# Altium PCB ProjectAir_Pcb.PcbDoc
Units mil, origin at the board's own origin, x right, y up, seen from the top; angles counter-clockwise.
Board outline 2165.35 x 1771.65 mil, 4 copper layers (Top Layer, GND02, PWR03, Bottom Layer), stack 23.756 mil thick; 49 components, 30 nets, 170 pads, 99 vias.
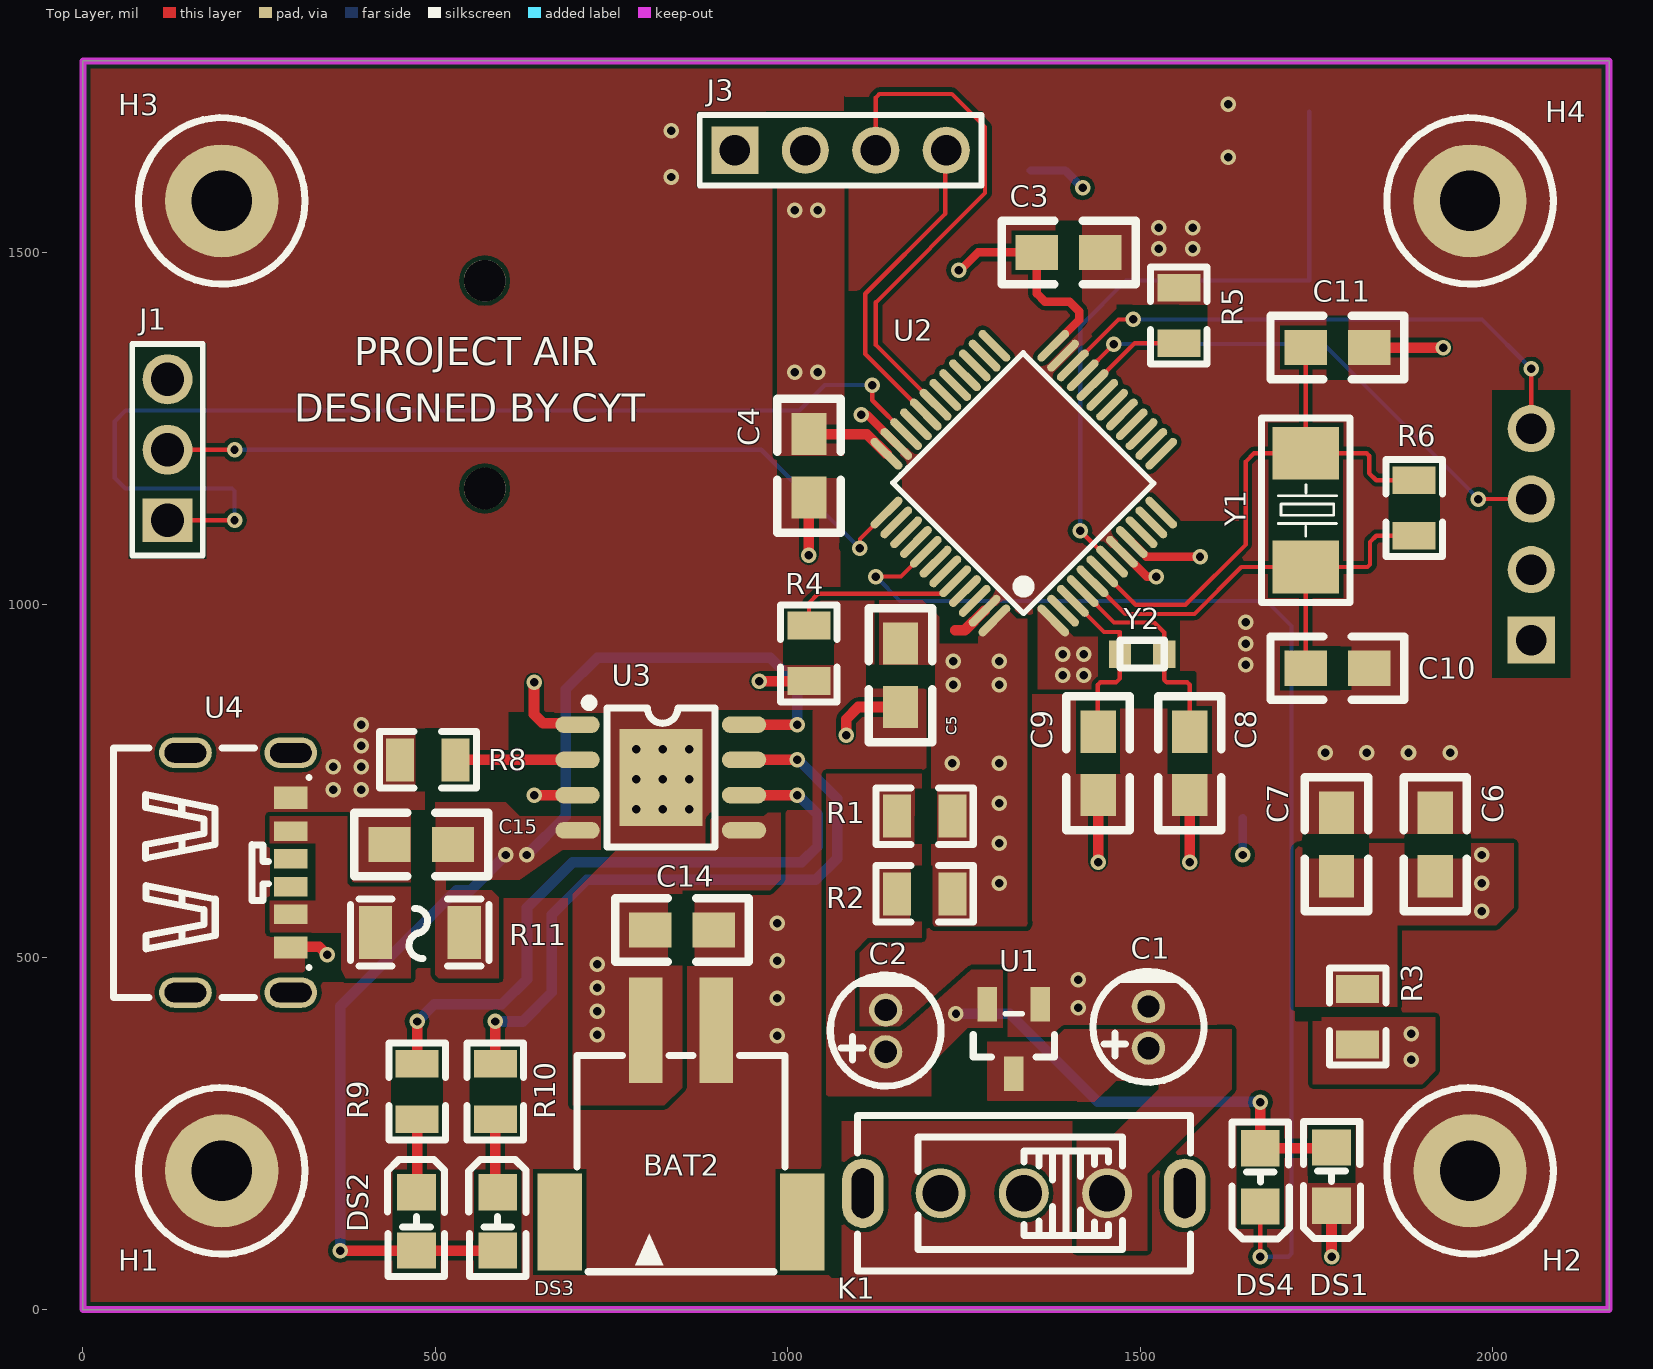
[diagram p0: Top Layer view]
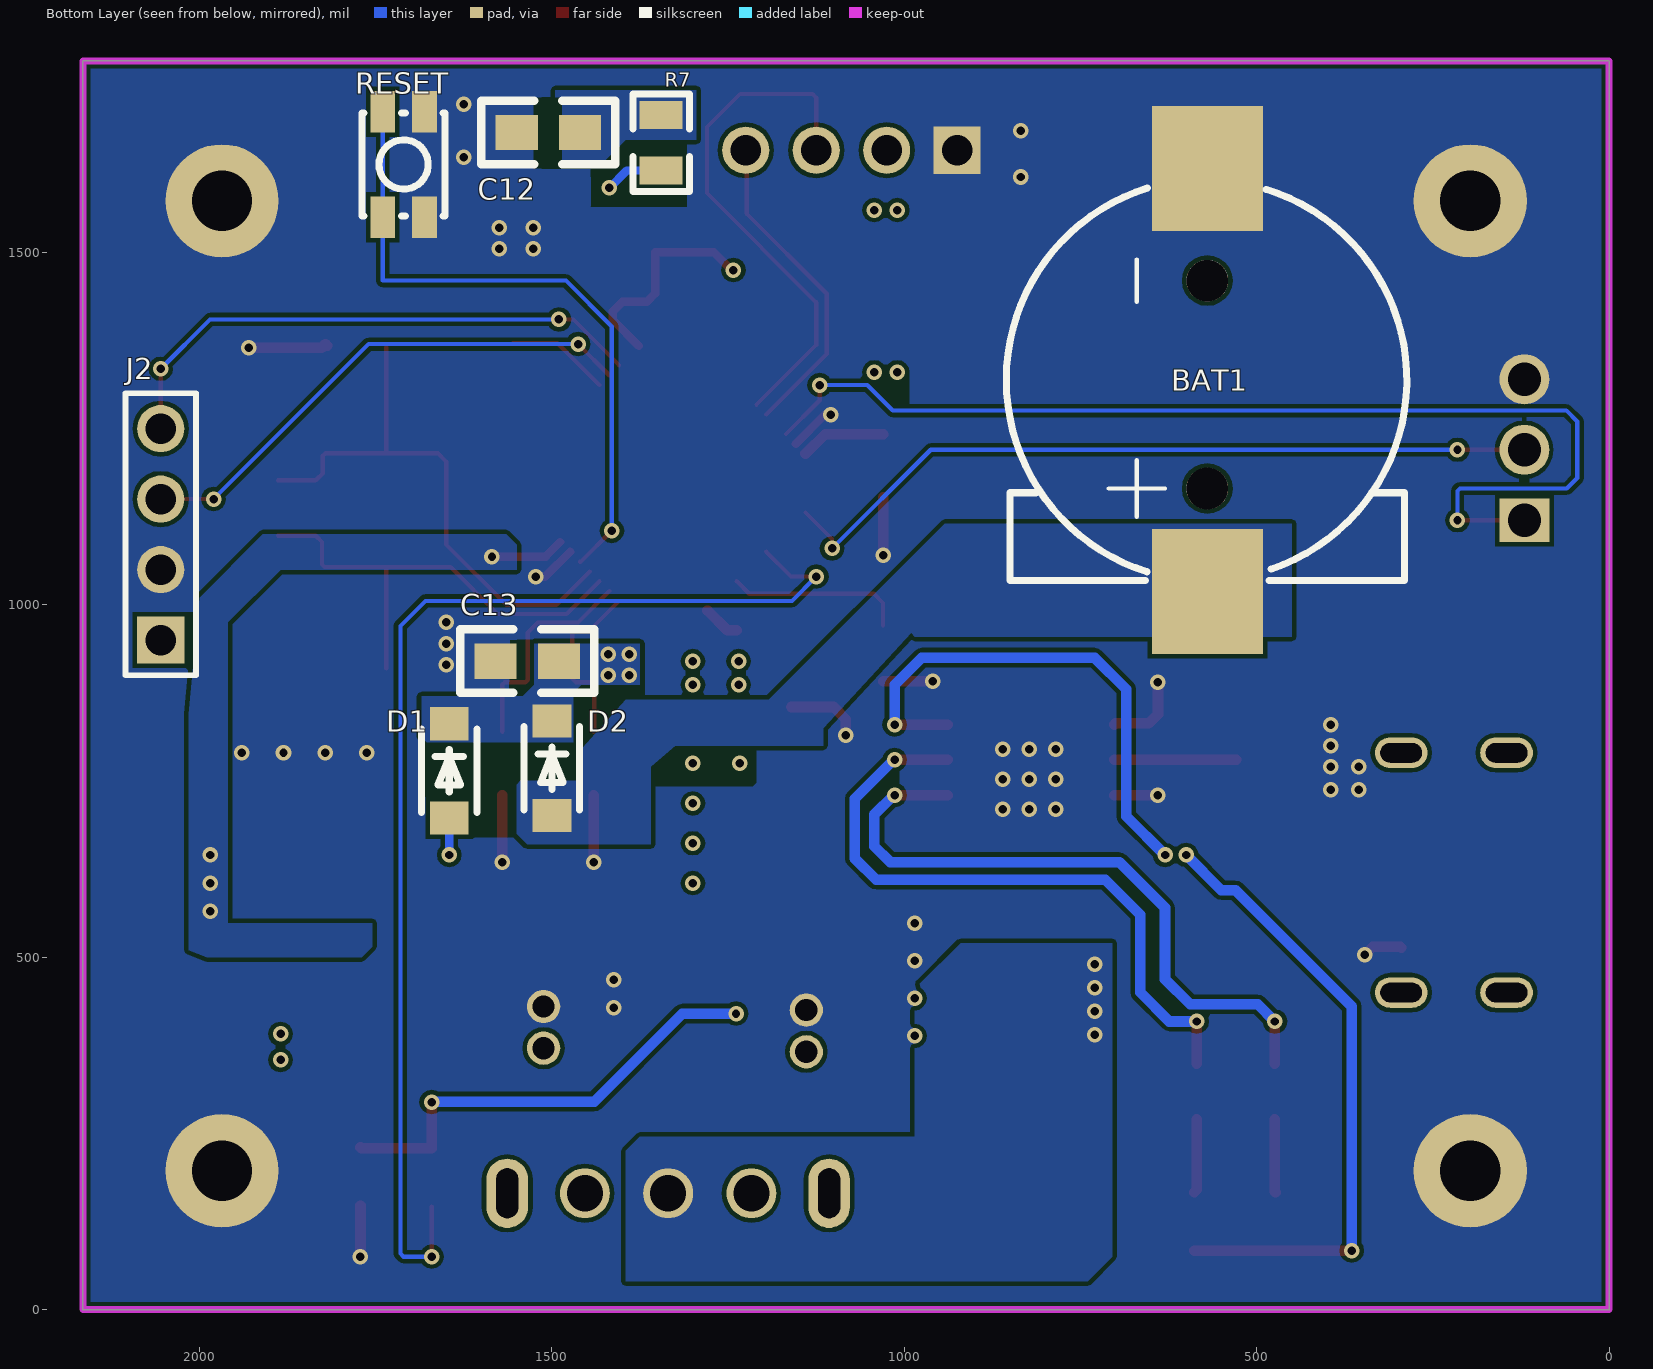
[diagram p1: Bottom Layer view, seen from below]
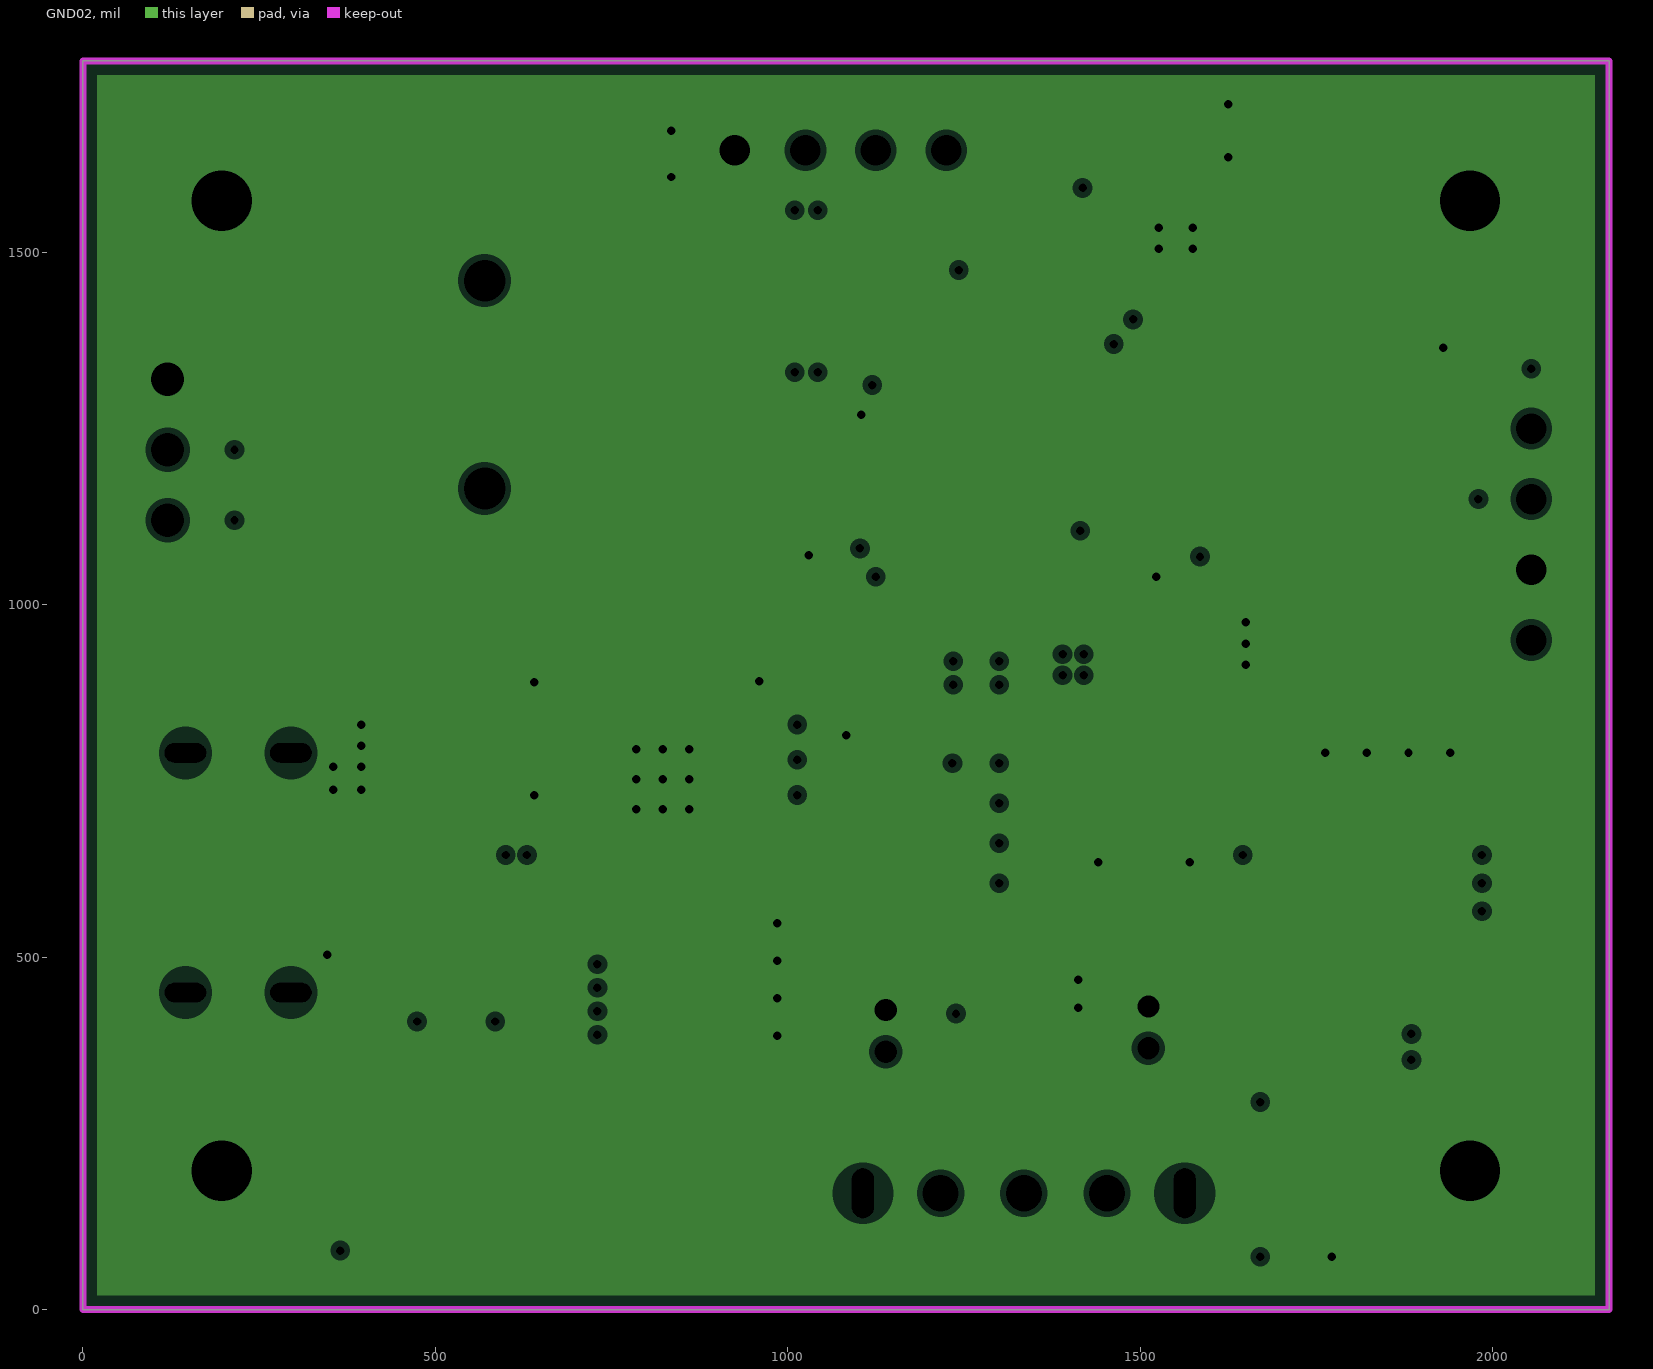
[diagram p2: GND02, clearances drawn from the general rule]
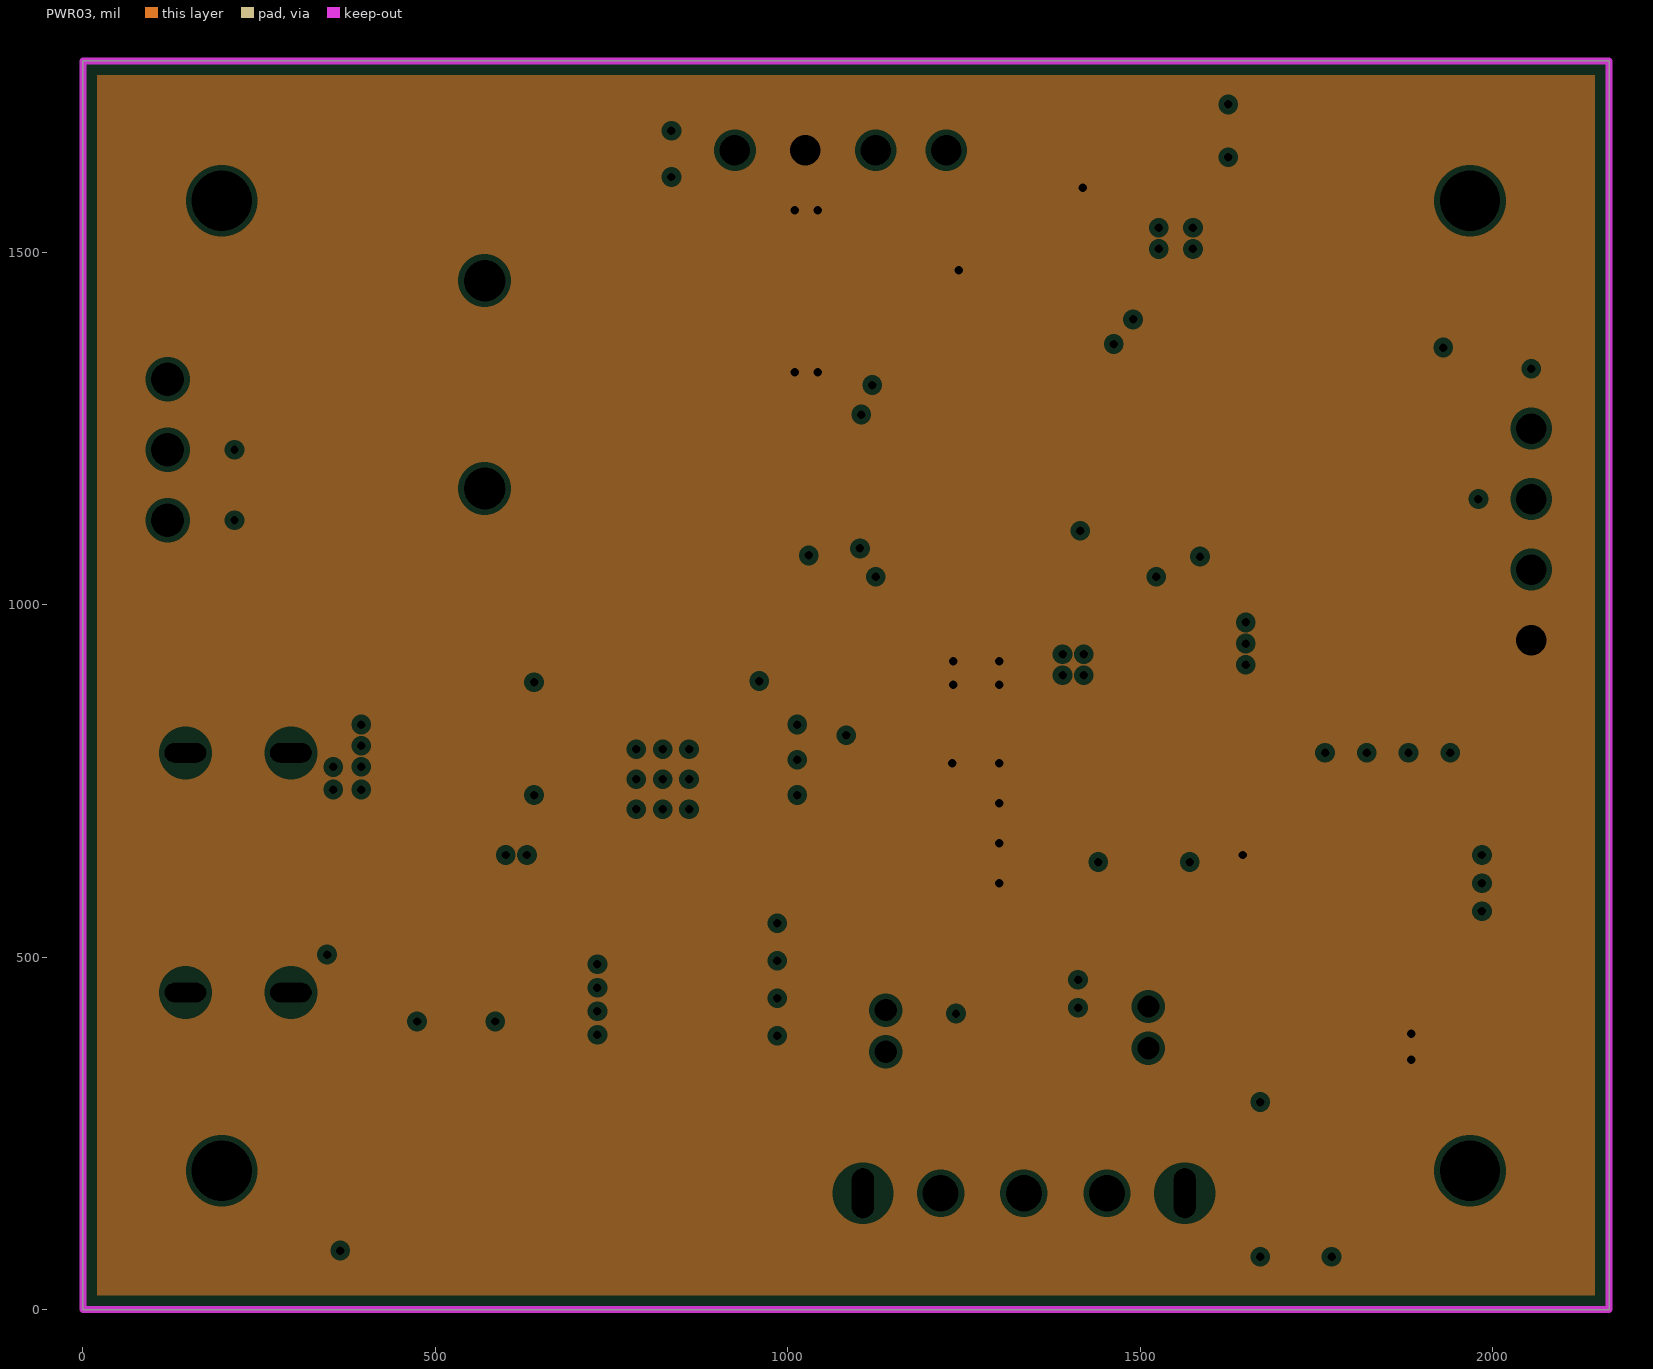
[diagram p3: PWR03, clearances drawn from the general rule]

## Layer stack, top to bottom
Top Solder: solder mask 0.4, Solder Resist, Dk 3.5
Top Layer: signal copper 1.4
Dielectric 2: prepreg 2.8, PP-006, Dk 4.1
GND02: plane copper 1.3779, net GND
Dielectric 1: dielectric 12.6, FR-4, Dk 4.8
PWR03: plane copper 1.3779, net VCC3.3M
Dielectric 3: prepreg 2.8, PP-006, Dk 4.1
Bottom Layer: signal copper 1.4
Bottom Solder: solder mask 0.4, Solder Resist, Dk 3.5

## Board outline
0,0 2165.35,0 2165.35,1771.65 0,1771.65

## Design rules (kind name [scope] priority, off if disabled: settings)
Clearance [All] p1: gap=6 ignorepadtopadclearanceinfootprint=FALSE
PlaneClearance [All] p1: clearance=8
PlaneConnect [All] p1: planeconnectstyle=Direct reliefexpansion=20 reliefentries=4 reliefconductorwidth=10 reliefairgap=10
PolygonConnect [All] p1: connectstyle=Direct reliefconductorwidth=10 reliefentries=4 polygonreliefangle="90 Angle" airgapwidth=10
RoutingVias [All] p1: holewidth=12 width=22 viastyle="Through Hole" minholewidth=12 minwidth=22 maxholewidth=14 maxwidth=26
SilkToSilkClearance [All] p1: silktosilkclearance=2
SolderMaskExpansion [All] p1: expansion=4
Width PWR [InNetClass('PWR')] p1: maxlimit=60 minlimit=12 preferedwidth=15 minimp=50.000000 maximp=50.000000 favimp=50.000000
Width [All] p2: maxlimit=10 minlimit=6 preferedwidth=6
27 further rules are at their usual default settings.

## Classes and differential pairs
net class PWR: GND NetDS2_2 NetDS3_2 NetR8_1 NetR9_2 NetR10_2 VBAT VCC3.3M VCC3.3V VCC3.7V VCC5V VDDA VUSB

## Components (designator, comment, footprint, x,y, rotation, side; value= is the part's Value field where it differs from the comment)
BAT1 "BATT" BAT_RTC 581.77,1315.41 r90 bottom
BAT2 "MAINBATTARY" MAINBAT 850,218.62 r0 top
C1 "Cap Pol3" "C Pol" 1510.52,401.32 r90 top value=1uF
C2 "Cap Pol3" "C Pol" 1137.83,396.16 r90 top value=1uF
C3 "104" 0805 1443.51,1499.94 r180 top
C4 "104" 0805 1029.94,1152.22 r90 top
C5 "104" 0805 1159.94,855 r90 top
C6 "10uF" 0805 1918.84,705 r270 top
C7 "104" 0805 1778.78,705 r270 top
C8 "10" 0805 1570.39,730 r90 top
C9 "10" 0805 1440.39,730 r90 top
C10 "22" 0805 1825,909.94 r180 top
C11 "22" 0805 1825,1364.94 r180 top
C12 "104" 0805 1460,1669.94 r0 bottom
C13 "104" 0805 1580,920.06 r180 bottom
C14 "10uF" 0805 895,538.62 r180 top
C15 "10uF" 0805 435,660.06 r0 top
D1 "1N4148" SOD-123 1645,765 r270 bottom
D2 "1N4148" SOD-123 1499.37,768.62 r270 bottom
DS1 "LED BLUE" 0805D 1772.66,186.1 r90 top
DS2 "LED GREEN" 0805D 472.06,127.64 r270 top
DS3 "LED RED" 0805D 587.39,127.64 r270 top
DS4 "LED BLUE" 0805D 1671.61,185 r90 top
H1 "HOLE" M2孔 196.85,196.85 r0 top
H2 "HOLE" M2孔 1968.15,196.85 r0 top
H3 "HOLE" M2孔 196.85,1573.15 r0 top
H4 "HOLE" M2孔 1968.15,1573.15 r0 top
J1 "1*3P排针" 1*3PIN 120,1220 r90 top
J2 "1*4P排母" 1*4Pin 2056,1101 r90 bottom
J3 "1*4P排母" 1*4Pin 1076,1646 r0 top
K1 "PWR SWITCH" "PWR SWITCH" 1330,165 r180 top
R1 "0R" 0805R 1195.47,700 r0 top
R2 "0R" 0805R 1195.47,590 r0 top
R3 "10R" 0805R 1808.78,414.53 r270 top
R4 "10K" 0805R 1030,930 r270 top
R5 "10K" 0805R 1555,1411.73 r90 top
R6 "1M" 0805R 1888.78,1138.49 r90 top
R7 "10K" 0805R 1345,1654.53 r270 bottom
R8 "1.2K" 0805R 488.27,780 r180 top
R9 "1K" 0805R 474.11,310.47 r90 top
R10 "1K" 0805R 585,310.47 r90 top
R11 "PTC 1A" PTC 479.57,535 r0 top
RESET "KEY_M" SMD 1711.42,1625.47 r90 bottom
U1 "SC662K-3.3V" SOT23-3 1309.73,385 r90 top
U2 "STM32F103C8T6" STM32F103C8T6 1335,1170 r45 top
U3 "TC4056A" ESOP-8 820,755 r270 top
U4 "TYPE-C" TYPE-C 198.11,619.53 r270 top
Y1 "8MHz" SMD-5032_2P 1735,1133.39 r90 top
Y2 "32.768K" SMD_1610 1505,930 r180 top

## Footprints (in the part's own frame and the unit in brackets; to place one, negate y for a bottom-side part, rotate by r counter-clockwise, add the part's x,y. Pads: shape width x height; smd on the part's side, far side on the other; paste and mask are expansions set on the pad)
1*3PIN [mm] "1*3PIN"
  rect 1.575x1.8 hole 1.2: 1(-2.54,0)
  round 1.8 hole 1.2: 2(0,0) 3(2.54,0)
  silkscreen extent -3.81,-1.27 3.81,1.27
1*4Pin [mil] "1*4PIN"
  rect 66.93x66.93 hole 43.31: 1(-151,-1)
  round 66.93 hole 43.31: 2(-51,-1) 3(49,-1) 4(149,-1)
  silkscreen extent -201,-51 199,49
0805 [mil]
  rect 60x50 smd: 1(0,-0.06) 2(90,-0.06)
  silkscreen extent -50,-45 140,45
0805D [mil] "DIODE 0805"
  rect 51.2x55.1 smd: 1(43.9,1.05) 2(-38.8,1.05)
  silkscreen extent -85,-40 81,41
0805R [mm] "0805R"
  rect 1x1.55 smd: 1(-1.028,0) 2(0.972,0)
  silkscreen extent -1.78,-1.02 1.72,1.02
BAT_RTC [mm] "BAT_RTC"
  rect 4.5x4 smd: 1(-7.529,-0.299) 2(7.711,-0.299)
  round 1.5 hole 1.5 unplated: ""(-3.82,-0.299) ""(3.673,-0.299)
  silkscreen extent -7.13,-7.49 7.01,6.95
"C Pol" [mm] "C Pol"
  round 1.2 hole 0.8: 1(-0.773,-0.031) 2(0.729,-0.031)
  silkscreen extent -2.01,-2.03 2.04,1.97
ESOP-8 [mm] "TC4056C"
  oval 0.6x1.598 smd: 1(-1.905,-3) 2(-0.635,-3) 3(0.635,-3) 4(1.905,-3) 5(1.905,3) 6(0.635,3) 7(-0.635,3) 8(-1.905,3)
  rect 3.5x3 smd: 9(0,0)
  silkscreen extent -2.84,-2.74 2.5,1.95
M2孔 [mm] "M2孔"
  round 4.08 hole 2.175: 1(0,0)
  silkscreen extent -3,-3 3,3
MAINBAT [mm] "MAINBATTARY"
  rect 1.2x3.8 smd: 1(-1.307,4.509) 2(1.233,4.509)
  rect 1.6x3.5 smd: 3(4.333,-2.391) 4(-4.407,-2.391)
  silkscreen extent -3.79,-4.19 3.71,3.61
PTC [mm] "PTC"
  rect 1.2x1.9 smd: 1(-1.64,0) 2(1.56,0)
  silkscreen extent -2.54,-1.2 2.46,1.2
"PWR SWITCH" [mm] "PWR SWITCH"
  round 1.8 hole 1.3: 1(-3.127,0) 2(-0.127,0) 3(2.873,0)
  oval 1.5x2.499 hole 0.8 slot 1.8 at 90 deg: 4(5.673,0) 5(-5.927,0)
  silkscreen extent -6.13,-2.8 5.87,2.8
SMD [mil] "KEY"
  rect 59.06x35.43 smd: 1(-75.47,28.58) 1(74.13,28.58) 2(-75.47,-30.47) 2(74.13,-30.47)
  silkscreen extent -74,-60 72,58
SMD-5032_2P [mm] "8M XTAL"
  rect 1.9x2.4 smd: 1(-2.027,0) 2(2.073,0)
  silkscreen extent -3.3,-1.6 3.35,1.6
SMD_1610 [mm] "32.766K XTAL"
  rect 0.8x1 smd: 1(-0.743,0) 2(0.857,0)
  silkscreen extent -0.74,-0.5 0.86,0.5
SOD-123 [mm] "1N4148"
  rect 1.2x1.4 smd: 1(1.714,-0.016) 2(-1.686,-0.016)
  silkscreen extent -1.49,-1.02 1.51,0.98
SOT23-3 [mm] "SC662K-3.3V"
  rect 1.25x0.7 smd: 1(1.224,-1.23) 2(1.224,0.67) 3(-1.275,-0.28)
  silkscreen extent -0.68,-1.74 0.87,1.18
STM32F103C8T6 [mm]
  oval 0.3x1.5 smd: 1(-2.703,-4.203) 2(-2.203,-4.203) 3(-1.703,-4.203) 4(-1.203,-4.203) 5(-0.703,-4.203) 6(-0.203,-4.203) 7(0.297,-4.203) 8(0.797,-4.203) 9(1.297,-4.203) 10(1.797,-4.203) 11(2.297,-4.203) 12(2.797,-4.203) 25(2.797,4.297) 26(2.297,4.297) 27(1.797,4.297) 28(1.297,4.297) 29(0.797,4.297) 30(0.297,4.297) 31(-0.203,4.297) 32(-0.703,4.297) 33(-1.203,4.297) 34(-1.703,4.297) 35(-2.203,4.297) 36(-2.703,4.297)
  oval 1.5x0.3 smd: 13(4.297,-2.703) 14(4.297,-2.203) 15(4.297,-1.703) 16(4.297,-1.203) 17(4.297,-0.703) 18(4.297,-0.203) 19(4.297,0.297) 20(4.297,0.797) 21(4.297,1.297) 22(4.297,1.797) 23(4.297,2.297) 24(4.297,2.797) 37(-4.203,2.797) 38(-4.203,2.297) 39(-4.203,1.797) 40(-4.203,1.297) 41(-4.203,0.797) 42(-4.203,0.297) 43(-4.203,-0.203) 44(-4.203,-0.703) 45(-4.203,-1.203) 46(-4.203,-1.703) 47(-4.203,-2.203) 48(-4.203,-2.703)
  silkscreen extent -3.28,-3.27 3.35,3.39
TYPE-C [mm] "TYPE-C 6P"
  oval 1.1x1.899 hole 0.7 slot 1.5 at 90 deg: 7(-4.33,2.461) 7(-4.33,-1.339) 7(4.31,2.461) 7(4.31,-1.339)
  rect 0.7x1.2 smd: A5(-0.51,2.461) A9(1.49,2.461) B5(0.49,2.461) B9(-1.51,2.461)
  rect 0.8x1.2 smd: A12(2.69,2.461) B12(-2.71,2.461)
  silkscreen extent -4.51,-3.94 4.49,3.11

## Part data
BAT1: library part BAT
BAT2: library part MAINBAT
C1 C2: "Polarized Capacitor (Surface Mount)", LatestRevisionDate=29-May-2009, LatestRevisionNote="IPC-7351 Footprint Added.", PackageDescription="Chip Capacitor", PackageReference=C0805, Published=8-Jun-2000, Publisher="Altium Limited"
C3 C4 C5 C6 C7 C8 C9 C10 C11 C12 C13: library part C
C14 C15: library part C_2
D1 D2: library part D
DS1 DS2 DS3 DS4: library part LED2, "Typical RED, GREEN, YELLOW, AMBER GaAs LED", PackageDocument=Feb-2002, LatestRevisionDate=17-Jul-2002, LatestRevisionNote="Re-released for DXP Platform.", PackageReference=3.2X1.6X1.1, Published=8-Jun-2000, Publisher="Altium Limited"
H1 H2 H3 H4: library part M2孔, "M2孔"
J2 J3: "排母"
R1 R2 R3 R4 R5 R6 R7: library part R
R8 R9 R10: library part R_1
R11: library part PTC保险
U1: "SCK662K-3.3V"
U2: "STM32 ARM-based 32-bit MCU with 64 Kbytes Flash, 48-pin LQFP, Industrial Temperature", ComponentLink1Description="Manufacturer Link", ComponentLink1URL=www.st.com/stm32, ComponentLink2Description=Datasheet, ComponentLink2URL=http://www.st.com/stonline/products/literature/ds/13587.pdf, DatasheetVersion="rev6, Mar-2008", PackageDescription="48-Pin Low-Profile Quad Flat Pack, 7 x 7 mm Body, 0.5 mm Pitch (LQFP48)", PackageReference=LQFP48, PackageVersion=Mar-2008, Published=30-May-2008, Publisher="Altium Limited"
U3: "充电芯片"
Y1: library part XTAL, "Crystal Oscillator", LatestRevisionDate=17-Jul-2002, LatestRevisionNote="Re-released for DXP Platform.", Published=8-Jun-2000, Publisher="Altium Limited"
Y2: library part XTAL_1, "Crystal Oscillator", LatestRevisionDate=17-Jul-2002, LatestRevisionNote="Re-released for DXP Platform.", Published=8-Jun-2000, Publisher="Altium Limited"

## Via types
v1: diameter 22, hole 12, Top Layer to Bottom Layer, tented both sides, 99 vias

## Nets (pads, with @x,y where several pads share a name; then routed paths per layer and width w, separated by ;. In a path a pad name is that pad's centre, name@x,y a point inside that pad or via, vN(x,y) a via of type N, cw(c..) or ccw(c..) an arc to the next point about the centre after c; other vN are vias at no path point)
"BAT SWITCH": BAT2.1 C14.2 K1.2 U3.5
  other v1: 730,390 730,423.33 730,456.67 730,490
BOOT0: R4.1 U2.44 | length 252.5
  Top Layer w6: R4.1 1030,1002.58 1043.15,1015.74 1219.88,1015.74 U2.44
BOOT1: R5.1 U2.20 | length 147.2
  Top Layer w6: U2.20 1432.88,1311.82 1492.33,1371.26 R5.1
GND: BAT1.2 BAT2.2 C1.2 C2.2 C3.1 C4.1 C5.1 C6.1 C7.1 C8.1 C9.1 C10.1 C11.1 C12.2 C13.1 C14.1 C15.1 DS1.2 H1.1 H2.1 H3.1 H4.1 J1.3 J2.2 J3.1 R4.2 R5.2 R8.2 RESET.2 U1.1 U2.8 U2.23 U2.35 U2.47 U3.1 U3.3 U3.9 U4.A12 U4.B12 | length 1051.5
  Top Layer w12: v1(1104.39,1270) 1112.29,1270 U2.35 U2.35 ; U2.8 1509.38,1040 v1(1523,1040)
  Top Layer w15: U4.A12 296.38,515 335,515 v1(346.31,503.69) ; v1(640,730) U3.3 ; v1(640,890) 640,844.94 653.29,831.65 700.24,831.65 U3.1 ; v1(959.49,891.73) R4.2 ; v1(1030,1070) C4.1 ; v1(1082.87,815) 1082.87,837.87 1100,855 C5.1 ; 1237.56,964.2 1251.45,964.2 1278.92,991.67 U2.47 ; v1(1440.45,635) C9.1 ; v1(1570.45,635) C8.1 ; v1(1771.61,75) DS1.2 ; C11.1@1818.78,1367.49 1821.29,1370 1826.29,1365 v1(1930,1365)
  other v1: 985,388.33 1411.93,428.2 985,441.67 1411.93,467.81 985,495 985,548.33 785,710 822.5,710 860,710 355,737.89 395,737.89 785,752.5 822.5,752.5 860,752.5 355,770 395,770.28 1762.5,790 1821.67,790 1880.83,790 1940,790 785,795 822.5,795 860,795 395,800 395,830 1650,915 1650,945 1650,975 1526.55,1505 1575,1505 1526.55,1535 1575,1535 835,1607.03 1625,1635 835,1672.48 1625,1710
NetBAT1_1: BAT1.1 D2.1
NetC8_2: C8.2 U2.4 Y2.1 | length 312.9
  Top Layer w6: U2.4 1463.02,975 1520,975 1534.26,960.74 Y2.1 1534.26,893.51 1537.77,890 1566.94,890 1570.45,886.49 C8.2
NetC9_2: C9.2 U2.3 Y2.2 | length 252.6
  Top Layer w6: U2.3 1448.69,961.49 1471.26,961.49 Y2.2 1471.26,895.39 1465.86,890 1443.51,890 1440,886.49 1440,820.45 C9.2
NetC10_2: C10.2 R6.1 U2.5 Y1.1 | length 684
  Top Layer w6: U2.5 1478.86,987 1577,987 1643.58,1053.58 Y1.1 ; C10.2 Y1.1 ; R6.1 1835,1098.02 1826.29,1089.3 1826.29,1057.09 1822.77,1053.58 Y1.1
NetC11_2: C11.2 R6.2 U2.6 Y1.2 | length 800.4
  Top Layer w6: U2.6 1493.7,1000 1564.26,1000 1650,1085.74 1650,1203.51 1661.49,1215 Y1.2 ; C11.2 Y1.2 ; R6.2 1835,1176.76 1825,1186.76 1825,1211.49 1821.49,1215 Y1.2
NetC12_1: C12.1 R7.1
NetDS2_2: DS2.2 R9.1 | length 104
  Top Layer w15: DS2.2 474.11,167.44 R9.1
NetDS3_2: DS3.2 R10.1 | length 105
  Top Layer w15: R10.1 585,169.88 DS3.2
NetR8_1: R8.1 U3.2 | length 173.2
  Top Layer w15: R8.1 U3.2
NetR9_2: R9.2 U3.6 | length 951.5
  Top Layer w15: R9.2 v1(474.11,408.74) ; U3.6 v1(1013.65,730)
  Bottom Layer w15: v1(474.11,408.74) 498.61,433.24 594.45,433.24 630,468.79 630,570 695,635 1020,635 1042.5,657.5 1042.5,702.5 1015,730 v1(1013.65,730)
NetR10_2: R10.2 U3.7 | length 944.9
  Top Layer w15: R10.2 v1(585,408.74) ; U3.7 v1(1013.65,780)
  Bottom Layer w15: v1(585,408.74) 623.74,408.74 665,450 665,560 715,610 1040,610 1070,640 1070,725 1015,780 v1(1013.65,780)
"PA10 SCL": J3.3 U2.31 | length 744.8
  Top Layer w6: J3.3 1125,1720 1130,1725 1232.84,1725 1280,1677.84 1280,1584.19 1125,1429.19 1125,1368.7 U2.31
"PA11 SDA": J3.4 U2.32 | length 458.1
  Top Layer w6: U2.32 1110,1355.87 1110,1441.36 1223.64,1555 1223.64,1643.64 J3.4
PB5: DS4.2 U2.41 | length 1713.6
  Top Layer w6: v1(1124.79,1040) 1160.62,1040 U2.41 ; v1(1670.56,75) DS4.2
  Bottom Layer w6: v1(1124.79,1040) 1159.21,1005.59 1679.41,1005.59 1715,970 1715,79.44 1710.56,75 v1(1670.56,75) v1@1670,74.44
"PB10 SCL": J2.3 U2.21 | length 745.9
  Top Layer w6: U2.21 v1(1462.78,1370) ; v1(1980,1150) J2.3
  Bottom Layer w6: v1(1462.78,1370) 1760,1370 v1(1980,1150)
"PB11 SDA": J2.4 U2.22 | length 791.8
  Top Layer w6: U2.22@1404.65,1339.65 U2.22 1404.6,1340.1 1469.5,1405 v1(1490,1405) ; J2.4 v1(2055,1335)
  Bottom Layer w6: v1(1490,1405) 1985,1405 v1(2055,1335)
RESET: RESET.1 U2.7 | length 945.3
  Top Layer w6: v1(1415,1105) 1458.73,1061.27 U2.7 U2.7@1460.28,1060.93
  Bottom Layer w6: v1(1415,1105) 1415,1395 1480,1460 1740,1460 1740,1550 RESET.1@1740,1699.61
SWCLK: J1.2 U2.37 | length 1106.9
  Top Layer w6: J1.2 v1(215,1220) ; v1(1102.5,1080) 1102.5,1093.24 U2.37
  Bottom Layer w6: v1(215,1220) 962.5,1220 v1(1102.5,1080)
SWDIO: J1.1 U2.34 | length 1580.1
  Top Layer w6: J1.1 v1(215,1120) ; v1(1120,1311.82) 1120,1290.19 U2.34
  Bottom Layer w6: v1(215,1120) 215,1161.49 211.49,1165 60,1165 45,1180 45,1260 60.57,1275.57 1016.35,1275.57 1052.6,1311.82 v1(1120,1311.82)
VBAT: C13.2 D1.2 D2.2 U2.1
  other v1: 1390,900 1420,900 1390,930 1420,930
VCC3.3M: C3.2 C4.2 C5.2 D1.1 J2.1 J3.2 R1.2 R2.2 R3.2 R7.2 U2.24 U2.36 U2.48 | length 572.2
  Top Layer w12: v1(1242.5,1475) 1245,1475 1270,1500 C3.2 1353.51,1441.49 1365,1430 1400,1430 1413.42,1416.58 1413.42,1404.15 U2.24
  Top Layer w15: C4.2 1112.29,1242.22 U2.36
  Bottom Layer w12: R7.2 1393.74,1616.26 v1(1418.41,1591.59) ; v1(1645.63,645) D1.1
  other v1: 1885,354.25 1885,391.14 1300,605 1300,661.67 1300,718.33 1233.74,775 1300,775 1235,886.49 1300,886.49 1235,920 1300,920 1010,1330 1042.5,1330 1010,1560 1042.5,1560
VCC3.3V: C2.1 DS1.1 DS4.1 R1.1 R2.1 U1.2 | length 650.9
  Top Layer w15: v1(1670.56,294.44) DS4.1 1770.51,228.9 DS1.1
  Bottom Layer w15: v1(1238.74,420) 1315,420 1440,295 1670,295 v1(1670.56,294.44)
VCC3.7V: C1.1 K1.1 U1.3
VCC5V: C15.2 DS2.1 DS3.1 R11.2 U3.4 U3.8 | length 1646.7
  Top Layer w15: v1(365,83.74) DS2.1 DS3.1 ; U3.8 v1(1013.65,830)
  Bottom Layer w15: v1(365,83.74) 365,430 530,595 550,595 v1(600,645) ; v1(630,645) 685,700 685,880 730,925 975,925 1013.65,886.35 v1(1013.65,830)
VDDA: C6.2 C7.2 R3.1 U2.9 | length 105.5
  Top Layer w12: U2.9 1488.25,1089.1 1508.94,1068.41 v1(1585,1068.41)
  other v1: 1985,565 1985,605 1985,645
VUSB: R11.1 U4.A9 U4.B9
pads on no net: BAT1. BAT2.3 BAT2.4 K1.3 K1.4 K1.5 U2.2 U2.10 U2.11 U2.12 U2.13 U2.14 U2.15 U2.16 U2.17 U2.18 U2.19 U2.25 U2.26 U2.27 U2.28 U2.29 U2.30 U2.33 U2.38 U2.39 U2.40 U2.42 U2.43 U2.45 U2.46 U4.7 U4.A5 U4.B5

## Polygon pours and split planes (outlines as drawn)
GND on Top Layer "Top Layer-GND" (solid, pour order 0): 1428.11,1565 1425,1561.89 1425,1420 1435,1410 1400,1375 1400,1365 1411.26,1365 1471.26,1425 1635,1425 1635,1555 1625,1565
VCC3.7V on Top Layer "Top Layer-VCC3.7V" (solid, pour order 92): 1410,83.74 1510,83.74 1510,192.36 1630,312.36 1630,397.5 1392.5,397.5 1375,380 1283.34,380 1283.34,296.66 1285,295 1435.86,295 1465.86,325 1526.55,325 1526.55,312.36 1454.19,240 1410,240
GND on Top Layer "Top Layer-GND 6" (solid, pour order 156): 0,1771.65 2165.35,1771.65 2165.35,0 0,0
VDDA on Top Layer "Top Layer-VDDA" (solid, pour order 154): 1865,430 1865,545 2005,545 2030,570 2030,661.67 1729.17,661.67 1720,652.5 1720,430
VBAT on Top Layer "Top Layer-VBAT" (solid, pour order 132): 1365,996.7 1365,995.63 1405.63,955 1440,955 1440,880 1355,880 1355,996.7
VCC3.3M on Top Layer "Top Layer-VCC3.3M" (solid, pour order 8): 985,1715 985,1195 1080,1195 1080,1228.3 1080,1280 1080,1715
VCC3.3M on Top Layer "Top Layer-VCC3.3M 1" (solid, pour order 114): 1310,995 1270,955 1270,945 1215,945 1215,983.39 1188.39,1010 1130,1010 1130,905.6 1135.6,900 1203.69,900 1203.69,543.69 1343.2,543.69 1344.52,545 1340,549.52 1340,980 1325,980
GND on Top Layer "Top Layer-GND 2" (solid, pour order 112): 1715,671.49 1716.49,670 2005,670 2005,870 1975,905 1920,965 1790,965 1785,960 1785,825 1740,825 1715,800
VCC3.3M on Top Layer "Top Layer-VCC3.3M 2" (solid, pour order 106): 1745,320 1900,320 1918.78,338.78 1918.78,415 1750,415 1745,410
VCC3.3V on Top Layer "Top Layer-VCC3.3V" (solid, pour order 98): 1305,482.45 1305,400 1255.34,400 1203.69,348.35 1203.69,302.5 1057.5,302.5 1055,305 1055,760 1190,760 1190,527.5 1113.78,527.5 1095,508.72 1095,395 1160,395 1167.97,400 1260.69,482.45
no net on Top Layer "Top Layer-No Net 2" (solid, pour order 100): 1690,595
GND on Top Layer "Top Layer-GND 3" (solid, pour order 94): 1325,490 1325,400 1605,400 1630,425 1630,490
no net on Top Layer "Top Layer-No Net 3" (solid, pour order 80): 590,585
VCC5V on Top Layer "Top Layer-VCC5V" (solid, pour order 78): 590,585 590,470 505,470 500,475 500,720 600,720 620,700 735,700 735,652.5 680.71,652.5 620,610 515,610 515,595 580,595
no net on Top Layer "Top Layer-No Net 4" (solid, pour order 74): 610,590
no net on Top Layer "Top Layer-No Net 5" (solid, pour order 66): 325,710
GND on Top Layer "Top Layer-GND 5" (solid, pour order 64): 260,755 340,755 340,840 360,860 485,860 485,610 480,605 385,605 385,703.68 260,703.68
VUSB on Top Layer "Top Layer-VUSB" (solid, pour order 36): 465,470 372.72,470 366.31,482.45 366.31,535 265,535 265,580 330,580 330,661.67 265,661.67 265,700 375,700 375,605 380,600 465,600
"BAT SWITCH" on Top Layer "Top Layer-BAT SWITCH" (solid, pour order 30): 1130,1010
GND on Top Layer "Top Layer-GND 4" (solid, pour order 28): 1020.59,580 865,580 870,575 870,302.5 972.5,302.5 1020.59,350.59
"BAT SWITCH" on Top Layer "Top Layer-BAT SWITCH 1" (solid, pour order 26): 825,600
"BAT SWITCH" on Top Layer "Top Layer-BAT SWITCH 2" (solid, pour order 24): 990,705 990,610 975,595 850,595 850,315 825,290 695,290 695,590 755,650 890,650 890,695 900,705
"BAT SWITCH" on Top Layer "Top Layer-BAT SWITCH 3" (solid, pour order 22): 910,700
GND on Top Layer "Top Layer-GND 1" (solid, pour order 10): 965,1710 975,1700 975,1561.29 807.16,1561.29 805,1563.45 805,1710
no net on Top Layer "Top Layer-No Net" (solid, pour order 4): 980,1715
no net on Top Layer "Top Layer-No Net 1" (solid, pour order 2): 970,1495
GND on Bottom Layer "Bottom Layer-GND 2" (solid, pour order 158): 0,1771.65 2165.35,1771.65 2165.35,0 0,0
GND on Bottom Layer "Bottom Layer-GND" (solid, pour order 148): 1705,1740 1705,1495 1700,1490 1660,1490 1660,1605 1515,1605 1515,1739.73
NetC12_1 on Bottom Layer "Bottom Layer-NetC12_1" (solid, pour order 144): 1295,1730 1295,1660 1395,1660 1430,1625 1495,1625 1495,1730
VDDA on Bottom Layer "Bottom Layer-VDDA" (solid, pour order 142): 1755,515 1770,500 1990,500 2015,510 2015,845 2000,1010 1910,1100 1565,1100 1550,1085 1550,1050 1885,1050 1960,975 1960,548.33 1755,548.33
no net on Bottom Layer "Bottom Layer-No Net 2" (solid, pour order 140): 1605,1040
VBAT on Bottom Layer "Bottom Layer-VBAT" (solid, pour order 128): 1375,945 1375,886.35 1458.65,886.35 1470,875 1470,805 1677.5,805 1685,812.5 1685,870 1541.55,870 1525,886.55 1525,945 1375,945
GND on Bottom Layer "Bottom Layer-GND 1" (solid, pour order 126): 1550,895 1670.56,895 1670.56,995 1550,995
NetBAT1_1 on Bottom Layer "Bottom Layer-NetBAT1_1" (solid, pour order 124): 1550,675 1535,660 1360,660 1360,770 1325,800 1115,800 1115,825 990,960 985,955 450,955 450,1115 460,1115 470,1115 942.34,1115 1192.34,865 1395,865 1462.78,790 1462.78,750 1545,750 1550,745
no net on Bottom Layer "Bottom Layer-No Net" (solid, pour order 102): 1275,805
"BAT SWITCH" on Bottom Layer "Bottom Layer-BAT SWITCH" (solid, pour order 88): 705,520 920.2,520 985,455.2 985,245 1375,245 1395,225 1395,40 740,40 705,75
no net on Bottom Layer "Bottom Layer-No Net 1" (solid, pour order 82): 940,830
VCC3.3M on Bottom Layer "Bottom Layer-VCC3.3M" (solid, pour order 38): 285,600
GND on GND02 (split plane): 2145.26,20.1 20.1,20.1 20.1,1751.56 2145.26,1751.56
VCC3.3M on PWR03 (split plane): 2145.26,20.1 20.1,20.1 20.1,1751.56 2145.26,1751.56

## Keep-outs
Keep-Out Layer:
  the board outline again, w10

## Other copper
Top Layer:
  pour cut-out: 1173.76,630 1174.03,630.27 1205.67,630.27 1205.67,547.7 1203.1,550.27 1173.1,550.27
  pour cut-out: 1180,739.73 1180.27,740 1211.91,740 1211.91,657.43 1209.34,660 1179.33,660
  pour cut-out: 1082.68,1445.48 1101.14,1445.48 1102.5,1446.83 1102.5,1347.08 1090.44,1347.08 1085.17,1352.36
  pour cut-out: 1648.81,1118.81 1647.38,1117.38 1647.38,1076.91 1641.17,1076.91 1564.26,1000 1554.26,1010 1464.1,1010 1464.1,1027.45 1555.45,1118.81
  pour cut-out: 1057.5,296.01 1410.43,296.01 1404.16,289.74 1404.16,267.83 1076.57,267.83 1075.62,266.88 1075.62,45 1062.68,45 1058.09,49.59 1058.09,199.39 1047.56,199.39 1046.95,200 1048.51,201.55 1048.51,305
  pour cut-out: 1050.41,300.41
  pour cut-out: 1409.45,856 1430.82,856 1430.82,874.45 1426.28,879 1409.45,879
  pour cut-out: 1410,873.51
  pour cut-out: 1343.86,879 1354,879 1355,880 1355,873.51 1347.21,873.51 1346.49,872.79
  pour cut-out: 1555.67,905.6 1577.65,905.6 1579.63,903.62 1579.63,886.49
  pour cut-out: 1532.31,980 1556.01,980 1556.01,955.68 1555.32,955 1539.45,955
  pour cut-out: 1496.21,784
  pour cut-out: 1448.69,905 1561.11,905 1570.45,895.66 1570.45,853.24 1453.04,853.24 1446.28,860
  pour cut-out: 1477.5,970 1525,970 1525,904.39 1525.08,904.32 1480.43,904.32
  pour cut-out: 1765,1410.08 1765,1319.24 1765.27,1319.52 1795,1319.52 1795,1410
  pour cut-out: 1757.85,1410.08
  pour cut-out: 1367.28,1469 1367.55,1469.27 1417.5,1469.27 1417.52,1469.26 1417.52,1430.47 1404.22,1443.76 1370.7,1443.76 1367.28,1447.19
  pour cut-out: 1436.77,1385.25 1440.89,1385.25 1473.76,1418.12 1470.59,1421.29 1465.86,1421.29 1465.86,1420.14 1430.67,1384.95
  pour cut-out: 1465,1426.31 1465.86,1425.45 1465.86,1377.23 1515.28,1377.23 1523,1384.95 1523,1425
  pour cut-out: 1515,1426.31 1515,1393.85 1520,1388.85 1595,1388.85 1595,1425
  pour cut-out: 1380,1545 1417.52,1545 1417.52,1455.02 1380,1455.02
  pour cut-out: 1875,675 1970,675 1970,639.61 1875,639.61
  pour cut-out: 1730,675 1825,675 1825,639.61 1730,639.61
  pour cut-out: 65,1371.26 175,1371.26 175,1065 65,1065
  pour cut-out: 485,735 538.97,737.89 538.97,750.78 556.31,768.12 602.9,768.12 602.9,729.39 598.1,724.59 495.41,724.59 495.41,703.41 485,691.33
  pour cut-out: 525,841.24
  pour cut-out: 471.49,825 471.49,735 506.66,735 506.66,825
  pour cut-out: 465,709.21 465,707.79 465,606.49 500.41,606.49 500.41,709.21
  pour cut-out: 465,584.59 465,484.98 500,484.95 500,584.59
  pour cut-out: 1282.68,296.01 1283.34,296.66 1283.34,380 1244.05,380 1210.19,346.14 1210.19,299.81 1206.38,296.01
  pour cut-out: 830,589.8 867.5,589.8 867.5,488.02 830,488.02
  pour cut-out: 993.49,944.79 1066.51,944.79 1065,943.27 1065,915 993.49,915
  pour cut-out: 1111.32,915 1209.29,915 1209.29,880 1207.77,881.52 1111.32,881.52
  pour cut-out: 1073.88,1092.82 1075,1091.7 1075,1015.74 1103.45,1015.74 1117.63,1029.91 1117.63,1057.36 1085,1089.99
  pour cut-out: 1080,1228.3 1080.16,1228.45 1109.78,1228.45 1161.47,1176.76 1161.47,1158.78 1150.88,1158.78 1102.5,1110.41 1102.5,1080 1073.88,1080 1073.13,1079.26
  pour cut-out: 985,1211.65 1080,1211.65 1080,1180.27 985.64,1180.27 985,1179.63
  pour cut-out: 1085.17,1352.36 1104.87,1352.36 1125,1332.23 1112.29,1319.52 1112.29,1254.15 1088.33,1254.15 1086.49,1255.98
  pour cut-out: 1095.87,1063.99 1095.87,1059.55 1108.78,1046.63 1111.32,1049.18 1156.82,1049.18 1163.2,1055.56 1120.5,1098.26 1120.5,1098 1114.76,1092.26 1114.76,1067.74
  pour cut-out: 1080,1721.49 1081.49,1720 1125,1720 1125,1695 1120,1690 1080,1690
  pour cut-out: 870,1700 1276.54,1700 1275,1698.46 1275,1591.59 870,1591.59
  pour cut-out: 2000,1304.39 2110,1304.39 2110,896.49 2000,896.49
  pour cut-out: 1805.16,1085
  pour cut-out: 1681.76,1171.6 1788.24,1171.6 1788.24,1093.24 1685.5,1093.24 1681.76,1096.98
  pour cut-out: 1852.27,1151.07 1925.29,1151.07 1925.29,1123.7 1852.27,1123.7
  pour cut-out: 1771,941 1800,941 1800,879 1771,879
  pour cut-out: 1539.45,784 1601.45,784 1601.45,760.9 1602.35,760 1539.45,760
  pour cut-out: 1409.45,784 1471.45,784 1471.45,760.9 1472.35,760 1409.45,760
  pour cut-out: 670,845.41 667.81,847.6 604.11,847.6 604.11,792.26 605.62,793.76 670,793.76
  pour cut-out: 972.5,850.64 1034.63,850.64 1035.27,850 1035,849.73 1035,709.21 975.96,709.21 972.5,712.67
  pour cut-out: 895.41,850 896.05,850.64 972.5,850.64 972.5,706.18 966.32,700 895,700
  pour cut-out: 601.01,770 604.78,766.24 670,766.24 670,706.49 620,706.49 600,726.49
  pour cut-out: 670,846.01 739.4,846.01 741.71,843.7 741.71,699.87 670,699.87
  pour cut-out: 554.43,766.24
  pour cut-out: 315.66,500.91 315.66,464.82 364.73,464.82 366.94,467.03 365,468.97 365,500.91
  pour cut-out: 580,595 590.41,584.59 695,584.59 695,590 755,650 683.21,650 680.71,652.5 625.71,597.5 582.5,597.5
  pour cut-out: 765,457.5
  pour cut-out: 1257.56,393.51 1244.05,380 1311.49,380 1311.49,400 1305,393.51
  pour cut-out: 1258.03,393.51
  pour cut-out: 1403.51,240 1404.16,240.66 1404.16,295 1435.86,295 1465.86,325 1526.55,325 1526.55,312.36 1454.19,240
  pour cut-out: 1397.16,295
  pour cut-out: 1695,380
  pour cut-out: 1720,423.51 1755,423.51 1757.85,420.66 1757.85,408.74 1721.26,408.74 1720,410
  pour cut-out: 1738.06,198.4 1805.16,198.4 1805.16,180 1738.51,180
  pour cut-out: 1738.06,198.4 1805.16,198.4 1805.16,180 1738.51,180
  pour cut-out: 1637.01,197.3 1704.11,197.3 1704.11,177.8 1637.01,177.8
  pour cut-out: 554.89,134.84 621.99,134.84 621.99,115.34 554.89,115.34
  pour cut-out: 439.56,134.84 506.66,134.84 506.66,115.34 439.56,115.34
  pour cut-out: 548.49,323.05 621.51,323.05 621.51,295.68 548.49,295.68
  pour cut-out: 437.59,323.05 510.62,323.05 510.62,295.68 437.59,295.68
  pour cut-out: 430,326.55
Bottom Layer:
  pour cut-out: 1007.02,763.99 1007.02,746.01 1048.03,705 1055.53,705 1055.53,710.53 1070,725 1032.14,762.86 1012.67,762.86
  pour cut-out: 910,1323.37
  pour cut-out: 992.67,1330 992.67,1277.9 995,1275.57 1016.35,1275.57 1052.6,1311.82 1036.59,1327.83 1030,1327.83
  pour cut-out: 1308.49,1590.57 1308.49,1565 1445,1565 1444.34,1565.66 1444.34,1608.26 1425.92,1608.26 1424.18,1610 1418.2,1604.02 1381.51,1604.02
  pour cut-out: 1380.41,1655 1400,1655 1430.09,1624.91 1445,1624.91 1445,1607.6 1443.68,1608.92 1417.07,1608.92 1397.49,1628.5 1381.51,1628.5 1381.51,1653.9
  pour cut-out: 1210,792.26 1211.25,793.51 1327.01,793.51 1355,765.52 1355,742.26 1215.24,742.26 1210,747.5
  pour cut-out: 2005.44,990 2005.97,989.47 2015.53,989.47 2015.53,966.02 2010,960.48 2010,960
  pour cut-out: 1485,1720 1485,1621.63 1483.37,1620 1484.86,1618.51 1526.55,1618.51 1526.55,1718.45 1525,1720
  pour cut-out: 1308.49,1655 1308.49,1641.95 1381.51,1641.95 1380,1643.46 1380,1655.41
  pour cut-out: 1308.49,1655
  pour cut-out: 1655,1739.73
  pour cut-out: 1679.69,757.67 1679.69,727.64 1672.46,720.41 1612.07,720.41 1612.07,667.9 1609.56,670.41 1554.59,670.41 1554.59,752 1559.08,756.49
  pour cut-out: 1368.51,886.35 1368.51,870 1369.08,869.43 1399.66,869.43 1399.66,863.23 1458.89,804 1470,815.11 1470,875 1458.65,886.35
  pour cut-out: 1539,799 1539.5,798.51 1610.28,798.51 1610.28,728.93 1612.07,727.14 1608.3,723.37 1557.5,723.37 1557.5,746.68 1549.59,754.59 1537.26,754.59
  pour cut-out: 1536.99,890.82 1559.08,890.82 1560.66,889.24 1560.66,875 1545.74,875 1534.79,885.95
  pour cut-out: 1525,951.49 1526.09,950.41 1560,950.41 1560,891.61 1560.66,889.24 1525,891.61
  pour cut-out: 1610.28,798.51 1676.2,798.51 1677.7,800 1679.69,798.01 1679.69,757.67 1610.14,757.67 1608.97,756.49
  pour cut-out: 1470.59,798.51 1536.51,798.51 1538.01,800 1540,798.01 1540,757.67 1470.45,757.67 1469.28,756.49

## Silkscreen, mask and mechanical layers (free items; w line width, h text height)
Top Overlay:
  text "PROJECT AIR" at 385,1340 h40
  text "DESIGNED BY CYT" at 300,1260 h40
Mechanical 1:
  the board outline again, w10